# Altium PCB PCB1_1.PcbDoc
Units mil, origin at the board's own origin, x right, y up, seen from the top; angles counter-clockwise.
Board outline 4500 x 2600 mil, 2 copper layers (Top Layer, Bottom Layer), stack 60.4 mil thick; 2 components, 3 nets, 8 pads, 4 vias.
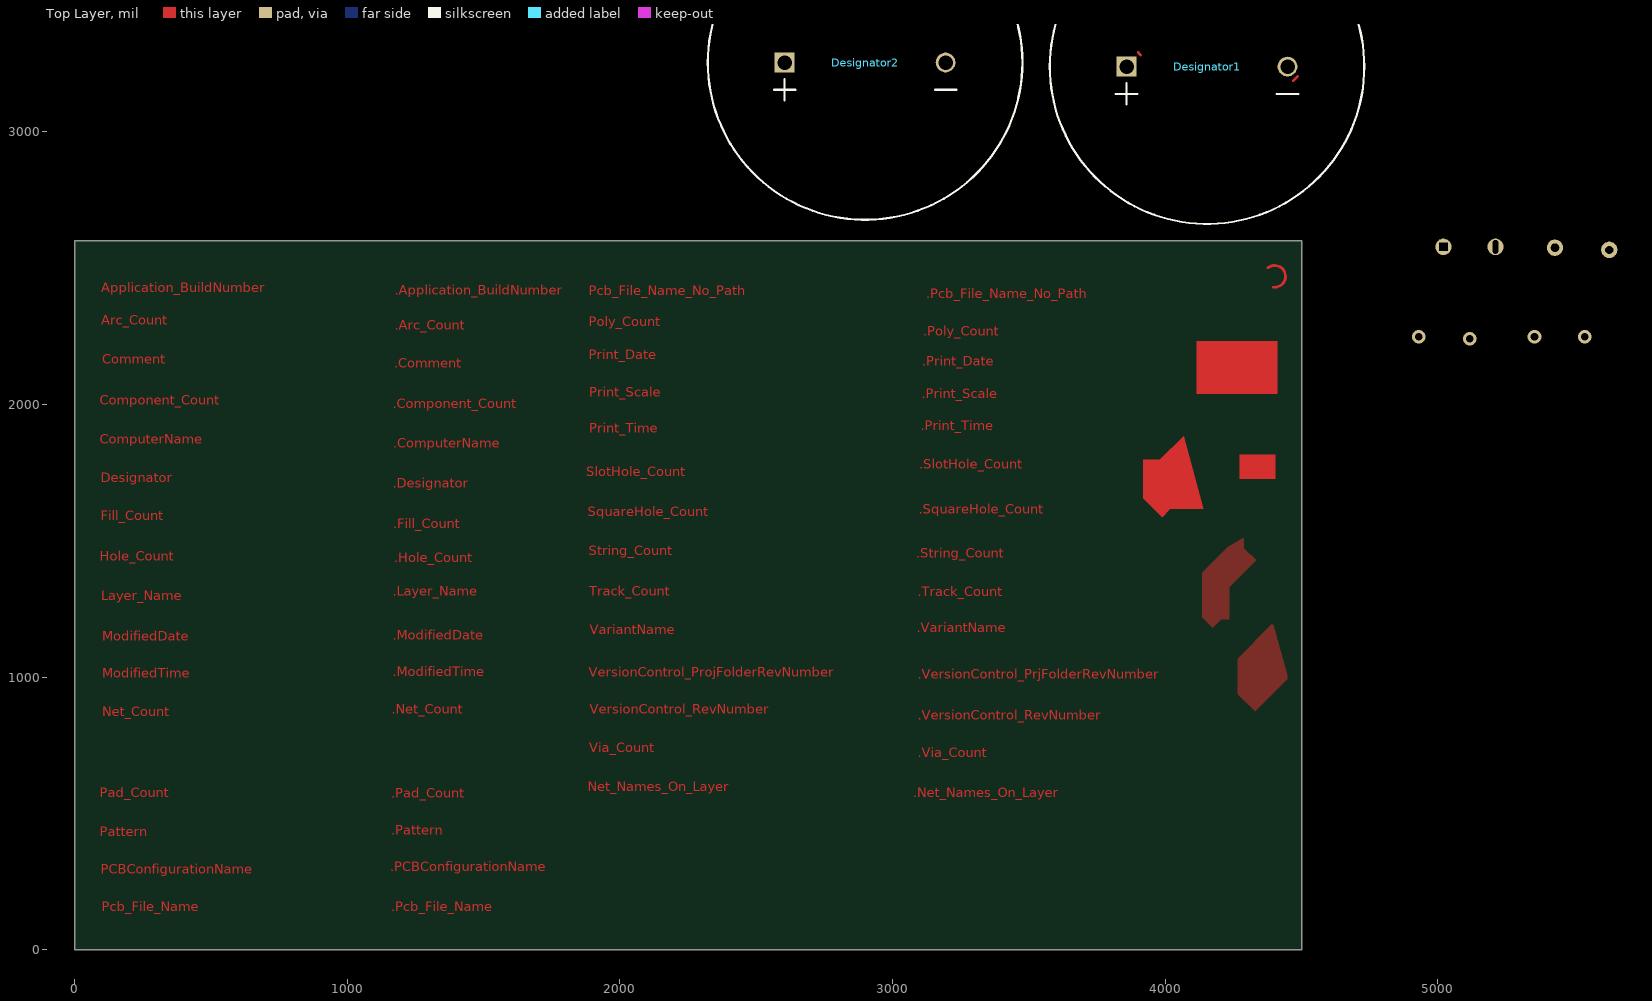
[diagram p0: Top Layer view]
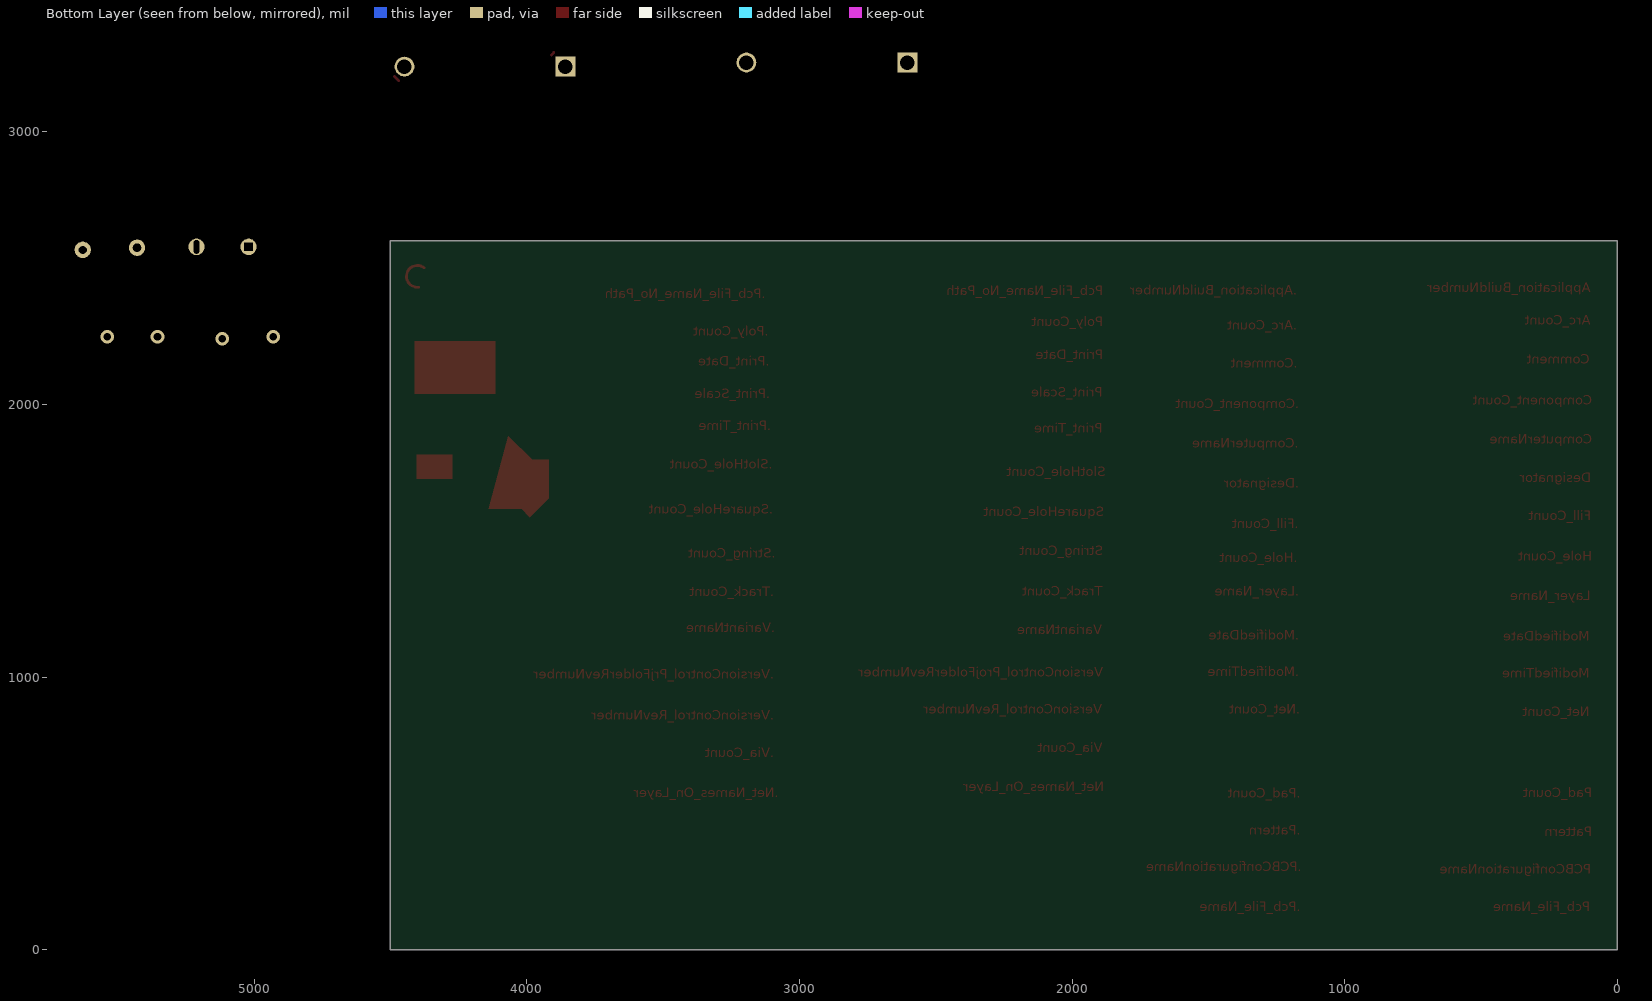
[diagram p1: Bottom Layer view, seen from below]

## Layer stack, top to bottom
Top Solder: solder mask 0.5, Solder Resist, Dk 3.3
Top Layer: signal copper 0.7
Dielectric1: core 59, FR-4, Dk 4.3
Bottom Layer: signal copper 0.7
Bottom Solder: solder mask 0.5, Solder Resist, Dk 3.3

## Board outline
0,0 4500,0 4500,2600 0,2600

## Design rules (kind name [scope] priority, off if disabled: settings)
Clearance [All] p1: gap=10 ignorepadtopadclearanceinfootprint=FALSE
DiffPairsRouting [All] p1: maxlimit=10 minlimit=10 mostfreqgap=10 toplayer_minwidth=10 toplayer_maxwidth=10 toplayer_prefwidth=10 bottomlayer_minwidth=10 bottomlayer_maxwidth=10 bottomlayer_prefwidth=10 maxuncoupledlength=500
HoleSize [All] p1: absolutevalues=TRUE maxlimit=300 minlimit=10 maxpercent=80.000 minpercent=20.000
MinimumAnnularRing [All] p1: minimumring=10
PasteMaskExpansion [All] p1: expansion=10
PlaneClearance [All] p1: clearance=15
PlaneConnect [All] p1: pad.planeconnectstyle=Relief pad.reliefexpansion=20 pad.reliefentries=4 pad.reliefconductorwidth=10 pad.reliefairgap=10 via.planeconnectstyle=Direct via.reliefexpansion=20 via.reliefentries=4 via.reliefconductorwidth=10 via.reliefairgap=10
PolygonConnect [All] p1: thpad.connectstyle=Relief thpad.reliefconductorwidth=10 thpad.reliefentries=4 thpad.polygonreliefangle="90 Angle" thpad.airgapwidth=10 smdpad.connectstyle=Relief smdpad.reliefconductorwidth=10 smdpad.reliefentries=4 smdpad.polygonreliefangle="90 Angle" smdpad.airgapwidth=10 via.connectstyle=Direct via.reliefconductorwidth=10 via.reliefentries=4 via.polygonreliefangle="90 Angle" via.airgapwidth=10
RoutingVias [All] p1: holewidth=10 width=20 viastyle="Through Hole" minholewidth=10 minwidth=20 maxholewidth=10 maxwidth=20
SMDNeckDown [All] p1: percent=100.000
SilkToSolderMaskClearance SilkscreenOverComponentPads [IsPad] p1: minsilkscreentomaskgap=10 clearancetoexposedcopper=TRUE
SolderMaskExpansion [All] p1: expansion=10 istentingtop=FALSE
Width [All] p1: maxlimit=10 minlimit=10 preferedwidth=10
24 further rules are at their usual default settings.

## Components (designator, comment, footprint, x,y, rotation, side; value= is the part's Value field where it differs from the comment)
Designator1 "Comment" ADAI-ADA1898 4153,3239 r0 top
Designator2 "Comment" ADAI-ADA1898 2899,3254 r0 top

## Footprints (in the part's own frame and the unit in brackets; to place one, negate y for a bottom-side part, rotate by r counter-clockwise, add the part's x,y. Pads: shape width x height; smd on the part's side, far side on the other; paste and mask are expansions set on the pad)
ADAI-ADA1898 [mm] "THD, 2-Leads, Dia 29.3mm, Pitch 15mm"
  rect 1.85x1.85 hole 1.35: 1(-7.5,0)
  round 1.85 hole 1.35: 2(7.5,0)
  silkscreen extent -14.65,-14.65 14.65,14.65, body extent -14.65,-14.65 14.65,14.65, height 11.95

## Free pads (board coordinates)
  round 60 hole 30 square: 1(5020,2578)
  round 60 hole 30: 2(5429,2575) 4(5628,2567)
  round 60 hole 50 slot 20 at 0 deg: 3(5211,2578)

## Via types
v1: diameter 50, hole 28, Top Layer to Bottom Layer, 3 vias
v2: diameter 50/50 (per signal layer), hole 28, Top Layer to Bottom Layer, 1 vias

## Nets (pads, with @x,y where several pads share a name; then routed paths per layer and width w, separated by ;. In a path a pad name is that pad's centre, name@x,y a point inside that pad or via, vN(x,y) a via of type N, cw(c..) or ccw(c..) an arc to the next point about the centre after c; other vN are vias at no path point)
A1: 
A2: 
A3: 
pads on no net: Designator1.1 Designator1.2 Designator2.1 Designator2.2
copper on no net: | length 189.9
  Top Layer w10: 3900.35,3290.42 3909.14,3281.63 ; 4376.71,2501.68 cw(c4401,2470) 4396.34,2430.35 ; 4469.57,3187.58 4484.63,3202.64
  other v1: 5117,2241 5354,2248 5538,2248
  other v2: 4930,2248

## Polygon pours and split planes (outlines as drawn)
no net on Top Layer "NONET_L01_P001" (solid, pour order 1): 4447,1007 4447,992 4329,874 4265,938 4265,1068 4394,1197
no net on Top Layer "NONET_L01_P000" (solid, pour order 0): 4231,1478 4136,1383 4136,1219 4174,1181 4205,1212 4234,1212 4234,1329 4333,1428 4288,1473 4288,1512

## Other copper
Top Layer:
  rectangle: 4273,1727 4404,1817
  rectangle: 4115,2038 4412,2233
  region: 4139,1618 4019,1618 3988,1587 3919,1656 3919,1797 3980,1797 4067,1884
  text "Application_BuildNumber" at 98,2398 h60
  text ".Application_BuildNumber" at 1174.94,2388.67 h60
  text "Pcb_File_Name_No_Path" at 1885,2388 h60
  text ".Pcb_File_Name_No_Path" at 3123,2376.66 h60
  text "Arc_Count" at 98,2279 h60
  text "Poly_Count" at 1885,2273.27 h60
  text ".Arc_Count" at 1175,2262 h60
  text ".Poly_Count" at 3111.94,2240 h60
  text "Print_Date" at 1885,2153 h60
  text "Comment" at 101,2136 h60
  text ".Print_Date" at 3109,2128.67 h60
  text ".Comment" at 1172,2122.67 h60
  text "Print_Scale" at 1887,2016 h60
  text ".Print_Scale" at 3106,2010.67 h60
  text "Component_Count" at 93,1986 h60
  text ".Component_Count" at 1166.94,1973 h60
  text ".Print_Time" at 3103,1892.67 h60
  text "Print_Time" at 1887,1884 h60
  text "ComputerName" at 93,1844 h60
  text ".ComputerName" at 1169,1827.67 h60
  text ".SlotHole_Count" at 3097.94,1752 h60
  text "SlotHole_Count" at 1876,1724 h60
  text "Designator" at 96,1701 h60
  text ".Designator" at 1166,1682.27 h60
  text ".SquareHole_Count" at 3095,1587 h60
  text "SquareHole_Count" at 1882,1578 h60
  text "Fill_Count" at 96,1562 h60
  text ".Fill_Count" at 1168.94,1533 h60
  text "String_Count" at 1885,1435 h60
  text ".String_Count" at 3086,1424.67 h60
  text "Hole_Count" at 93,1414 h60
  text ".Hole_Count" at 1172,1407.67 h60
  text ".Layer_Name" at 1166,1286.27 h60
  text "Track_Count" at 1887,1286.27 h60
  text ".Track_Count" at 3092,1284 h60
  text "Layer_Name" at 98,1269 h60
  text ".VariantName" at 3089,1151.66 h60
  text "VariantName" at 1890,1144 h60
  text ".ModifiedDate" at 1166,1124.67 h60
  text "ModifiedDate" at 101,1121 h60
  text ".ModifiedTime" at 1166,989.67 h60
  text "VersionControl_ProjFolderRevNumber" at 1885,989 h60
  text "ModifiedTime" at 101,985 h60
  text ".VersionControl_PrjFolderRevNumber" at 3092,981.61 h60
  text ".Net_Count" at 1164,852.67 h60
  text "VersionControl_RevNumber" at 1890,852 h60
  text "Net_Count" at 102,844 h60
  text ".VersionControl_RevNumber" at 3092,830.61 h60
  text "Via_Count" at 1887,712 h60
  text ".Via_Count" at 3092,693 h60
  text "Net_Names_On_Layer" at 1882,569 h60
  text "Pad_Count" at 93,547 h60
  text ".Net_Names_On_Layer" at 3076,547.27 h60
  text ".Pad_Count" at 1161,544.67 h60
  text ".Pattern" at 1161,409.61 h60
  text "Pattern" at 93,404 h60
  text ".PCBConfigurationName" at 1158,275.27 h60
  text "PCBConfigurationName" at 96,267 h60
  text "Pcb_File_Name" at 99,129 h60
  text ".Pcb_File_Name" at 1161,129.27 h60